# EAGLE board spring-terminal (EAGLE 7.1.0)
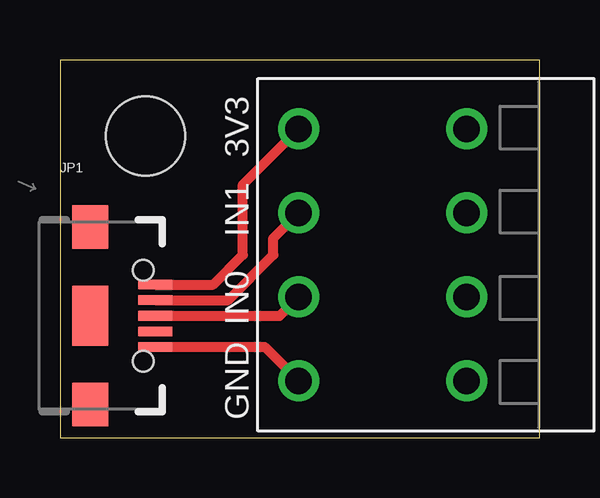
[diagram p0: board, top side]
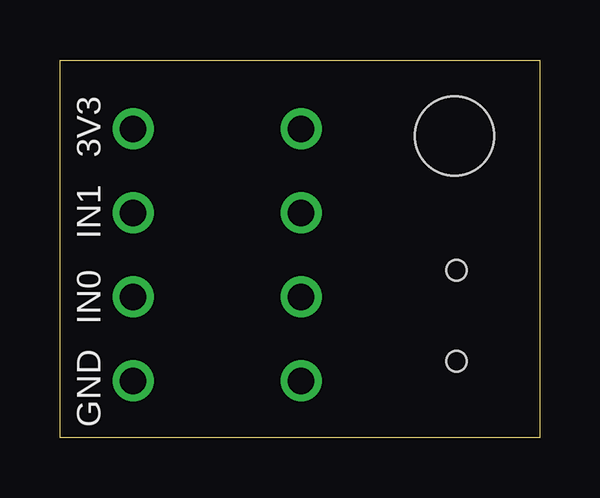
[diagram p1: board, bottom side, seen from below]

Size 19.99 x 15.74 mm. Coordinates in mm from the lower left corner, seen from the top.
Outline: 0,0 19.99,0 19.99,15.74 0,15.74 0,0
Copper layers (1*16): Top 0.035mm / dielectric 1.5mm / Bottom 0.035mm
Design rules "SparkFun": minimum track width 8mil, minimum drill 20mil, track to track 8mil, track to pad 8mil, pad to pad 8mil, via to via 8mil, smd to smd 8mil, copper to edge 10mil, drill to drill 8mil, minimum pad ring 12mil, minimum via ring 10mil, stop-mask expansion 4mil, vias tented up to drill 25mil, thermal gap 10mil

## Footprints (pad centres in the part's own frame; a part is rotated, then mirrored left to right if it is on the bottom)
USB-B-MICRO-SMD_V03 = smd 1.4 x 0.4: D+1 2.7,0; D-1 2.7,0.65; GND1 2.7,-1.3; ID1 2.7,-0.65; VBUS1 2.7,1.3 | smd 1.5 x 1.8: SHIELD1 0,3.7; SHIELD2 0,-3.7 | smd 1.5 x 2.5: SHIELD3 0,0 | hole 0.85: 2.2,1.9; 2.2,-1.9
1X04_PUSH_BTN_TERM = drill 1.1 pad 1.676: P$1 -5.25,5.3; P$2 -1.75,5.3; P$3 1.75,5.3; P$4 5.25,5.3; P$5 5.25,-1.7; P$6 1.75,-1.7; P$7 -1.75,-1.7; P$8 -5.25,-1.7
STAND-OFF = hole 3.302: 0,0

## Placement (x,y rotation side)
JP1  USB  [USB-B-MICRO-SMD_V03]  1.27,5.08 0 top
JP2  [1X04_PUSH_BTN_TERM]  15.24,7.62 90 top
U$1  [STAND-OFF]  3.56,12.57 0 top

## Library data of the parts
JP1 JP2 = SparkFun-Connectors
U$1 = SparkFun-Electromechanical

## Nets
3V3: JP1.VBUS1 JP2.P$4
D+: JP1.D+1 JP2.P$2
D-: JP1.D-1 JP2.P$3
GND: JP1.GND1 JP2.P$1

## Tracks (layer width: path | path; a pad name or v marks a point on that pad's centre or on a via)
3V3
  Top 0.406: JP1.VBUS1 6.38,6.38 7.62,7.62 7.62,10.55 JP2.P$4
D+
  Top 0.406: JP1.D+1 9.15,5.08 JP2.P$2
D-
  Top 0.406: JP1.D-1 7,5.73 8.89,7.62 8.89,8.32 JP2.P$3
GND
  Top 0.406: JP1.GND1 8.53,3.78 JP2.P$1

## Text on the board
tPlace: 3V3 | IN1 | IN0 | GND
bPlace: 3V3 | IN1 | IN0 | GND